# EAGLE board atmega1280_2560_tqfp100 (EAGLE 6.1)
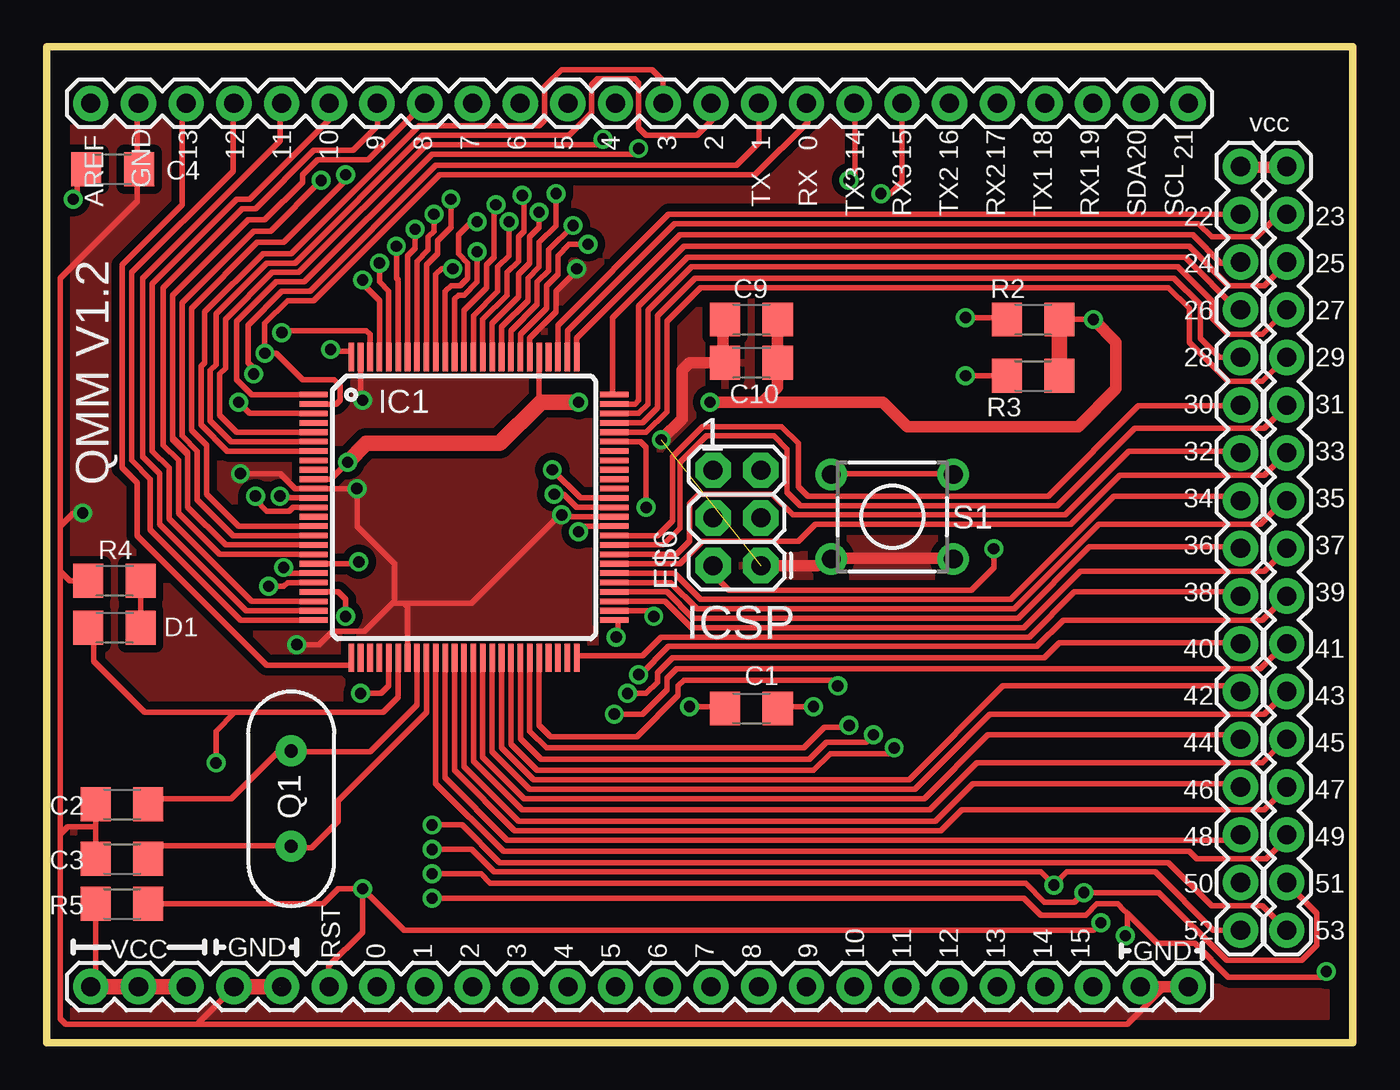
[diagram p0: board, top side]
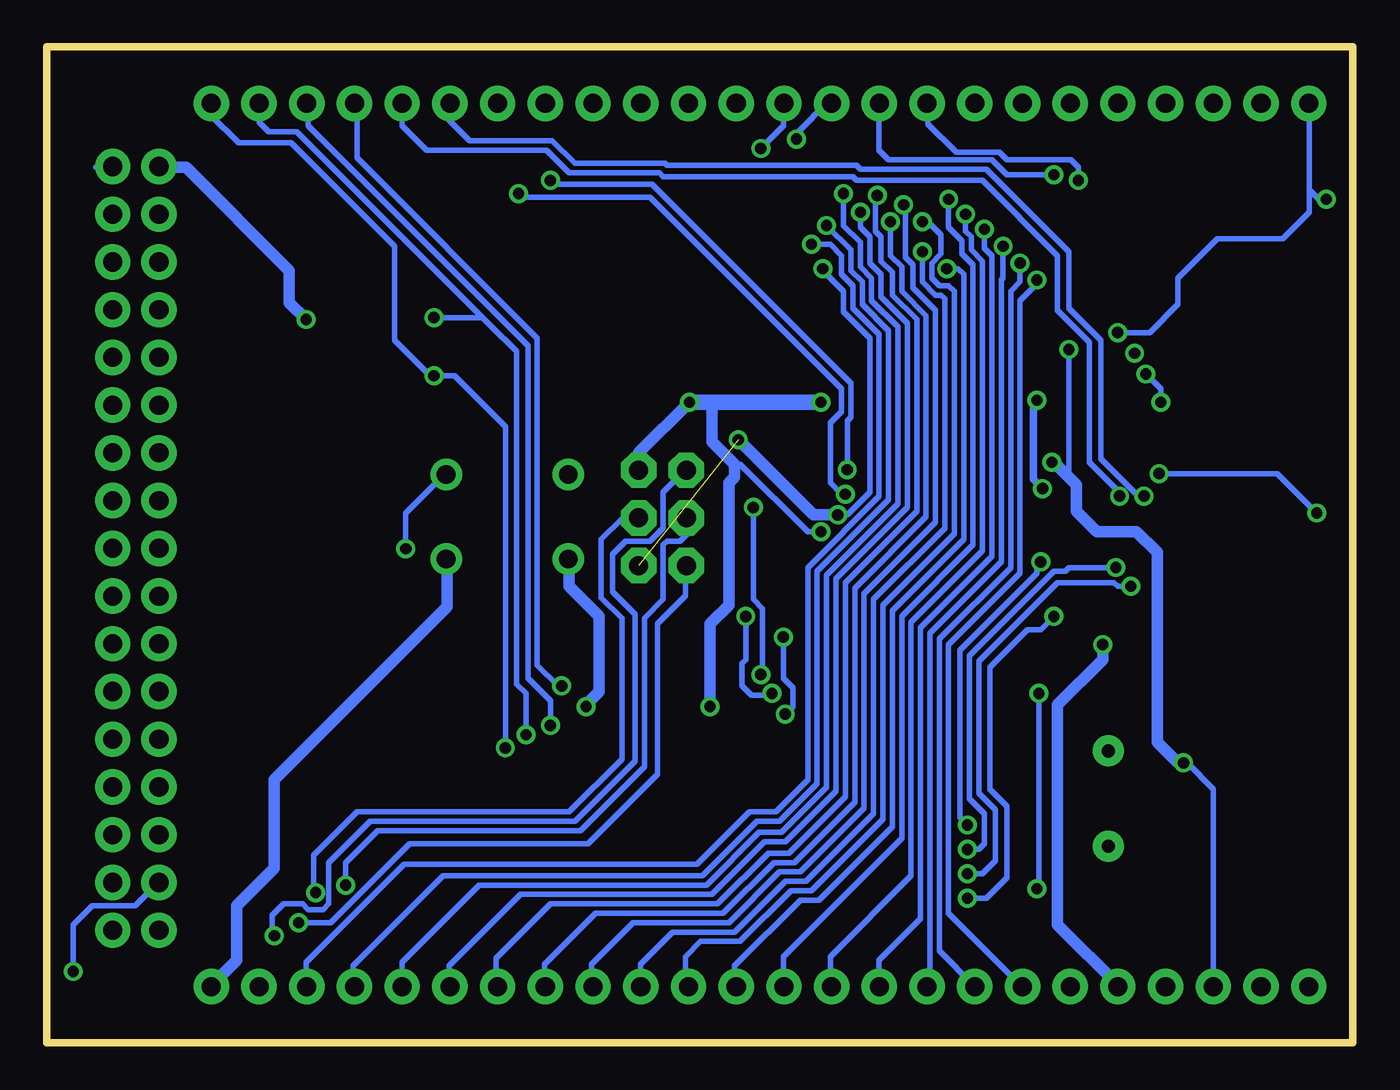
[diagram p1: board, bottom side, seen from below]

Size 69.5 x 53 mm. Coordinates in mm from the lower left corner, seen from the top.
Outline: 69.5,0 69.5,53 0,53 0,0 69.5,0
Copper layers (1*16): Top 0.035mm / dielectric 1.5mm / Bottom 0.035mm
Design rules: minimum track width 10mil, minimum drill 24mil, track to track 16mil, track to pad 16mil, pad to pad 16mil, via to via 16mil, smd to smd 16mil, copper to edge 40mil, drill to drill 8mil, minimum pad ring 10mil, minimum via ring 8mil, stop-mask expansion 4mil, vias tented up to drill 0mil, thermal gap 10mil

## Footprints (pad centres in the part's own frame; a part is rotated, then mirrored left to right if it is on the bottom)
1206 = smd 1.6 x 1.8: 1 -1.4,0; 2 1.4,0
1X17 = drill 1.016 pad 1.88: 1 0,0; 2 2.54,0; 3 5.08,0; 4 7.62,0; 5 10.16,0; 6 12.7,0; 7 15.24,0; 8 17.78,0; 9 20.32,0; 10 22.86,0; 11 25.4,0; 12 27.94,0; 13 30.48,0; 14 33.02,0; 15 35.56,0; 16 38.1,0; 17 40.64,0
1X24 = drill 1.016 pad 1.88: 2 -26.67,0; 3 -24.13,0; 4 -21.59,0; 5 -19.05,0; 6 -16.51,0; 7 -13.97,0; 8 -11.43,0; 9 -8.89,0; 10 -6.35,0; 11 -3.81,0; 12 -1.27,0; 13 1.27,0; 14 3.81,0; 15 6.35,0; 16 8.89,0; 17 11.43,0; 18 13.97,0; 19 16.51,0; 20 19.05,0; 21 21.59,0; 22 24.13,0; 23 26.67,0; 24 29.21,0; 25 31.75,0
2X3 = drill 1.016 pad 1.88 octagon: 1 0,0; 2 0,2.54; 3 2.54,0; 4 2.54,2.54; 5 5.08,0; 6 5.08,2.54
TQFP100 = smd 1.5 x 0.3: 1 -8,6; 2 -8,5.5; 3 -8,5; 4 -8,4.5; 5 -8,4; 6 -8,3.5; 7 -8,3; 8 -8,2.5; 9 -8,2; 10 -8,1.5; 11 -8,1; 12 -8,0.5; 13 -8,0; 14 -8,-0.5; 15 -8,-1; 16 -8,-1.5; 17 -8,-2; 18 -8,-2.5; 19 -8,-3; 20 -8,-3.5; 21 -8,-4; 22 -8,-4.5; 23 -8,-5; 24 -8,-5.5; 25 -8,-6; 51 8,-6; 52 8,-5.5; 53 8,-5; 54 8,-4.5; 55 8,-4; 56 8,-3.5; 57 8,-3; 58 8,-2.5; 59 8,-2; 60 8,-1.5; 61 8,-1; 62 8,-0.5; 63 8,0; 64 8,0.5; 65 8,1; 66 8,1.5; 67 8,2; 68 8,2.5; 69 8,3; 70 8,3.5; 71 8,4; 72 8,4.5; 73 8,5; 74 8,5.5; 75 8,6 | smd 0.3 x 1.5: 26 -6,-8; 27 -5.5,-8; 28 -5,-8; 29 -4.5,-8; 30 -4,-8; 31 -3.5,-8; 32 -3,-8; 33 -2.5,-8; 34 -2,-8; 35 -1.5,-8; 36 -1,-8; 37 -0.5,-8; 38 0,-8; 39 0.5,-8; 40 1,-8; 41 1.5,-8; 42 2,-8; 43 2.5,-8; 44 3,-8; 45 3.5,-8; 46 4,-8; 47 4.5,-8; 48 5,-8; 49 5.5,-8; 50 6,-8; 76 6,8; 77 5.5,8; 78 5,8; 79 4.5,8; 80 4,8; 81 3.5,8; 82 3,8; 83 2.5,8; 84 2,8; 85 1.5,8; 86 1,8; 87 0.5,8; 88 0,8; 89 -0.5,8; 90 -1,8; 91 -1.5,8; 92 -2,8; 93 -2.5,8; 94 -3,8; 95 -3.5,8; 96 -4,8; 97 -4.5,8; 98 -5,8; 99 -5.5,8; 100 -6,8
HC49US = drill 0.7 pad 1.651: 1 -2.54,0; 2 2.54,0
TL1105 = drill 1 pad 1.676: 1 -2.25,3.25; 2 2.25,3.25; 3 -2.25,-3.25; 4 2.25,-3.25

## Placement (x,y rotation side)
C1  0.1uF  [1206]  37.5,17.8 0 top
C2  22pF  [1206]  4,12.7 0 top
C3  22pF  [1206]  4,9.8 0 top
C4  0.1uF  [1206]  3.5,46.5 0 top
C9  0.1uF  [1206]  37.5,38.5 0 top
C10  0.1uF  [1206]  37.5,36.2 0 top
D1  [1206]  3.6,22.1 0 top
E$3  [1X17]  66,6 90 top
E$4  [1X17]  63.54,6 90 top
E$5  [1X24]  29,50 0 top
E$6  [2X3]  38,25.4 90 top
E$27  [1X24]  29,3 0 top
IC1  [TQFP100]  22.2,28.5 0 top
Q1  16MHz  [HC49US]  13,13 90 top
R2  10K  [1206]  52.5,38.5 0 top
R3  10K  [1206]  52.5,35.5 0 top
R4  330  [1206]  3.6,24.6 0 top
R5  10K  [1206]  4,7.4 0 top
S1  [TL1105]  45,28 90 top

## Library data of the parts
C1-C4 C9 C10 D1 E$3-E$6 E$27 IC1 Q1 R2-R5 = SparkFun
S1 = switch

## Nets
GND: C10.1 E$6.1
S$15: E$3.1
S$31: IC1.12
S$36: E$3.16
S$59: R5.1
S$65: R2.2 R3.2
S$68: E$3.6
S$73: E$3.11
S$80: IC1.5
S$86: IC1.3

## Tracks (layer width: path | path; a pad name or v marks a point on that pad's centre or on a via)
GND  (via drill 0.6)  (2 unrouted)
  Top 0.305: 14.1,29.5 13.2,29.5 12.4,30.3 v10.3,30.3 | 2.6,10.2 2.6,11.5 | 2.6,11.5 2.6,12.9 2.5,13 | 2.6,11.5 1.1,11.5 0.7,11.1 | 0.7,11.1 0.7,1.3 1,1 8,1 | 8,1 10,3 | 0.7,11.1 0.7,25.1 | 0.7,25.1 0.7,27.5 | 0.7,27.5 0.7,40.7 4.8,44.8 4.8,50 4.9,50.1 | 8,1 57.5,1 59.5,3 | 2.3,24.6 1.2,24.6 0.7,25.1 | v1.9,28.2 1.4,28.2 0.7,27.5 | 41.7,25.8 41.7,25.7 | 25.7,37.1 25.7,37.5 27.1,38.9 27.1,40 28.2,41.1 v28.2,41.2 | 16.7,36 16.7,34.3 v16.8,34.2 | 14.5,29.5 v16.5,29.5 16.5,27.5 18.5,25.5 18.5,23.5 18.4,23.4 | 29.7,28 27.5,28 v27.4,28.1 27.3,28.1 22.6,23.4 19,23.4 | 19,23.4 18.4,23.4 | 18.4,23.4 16.9,21.9 15.2,21.9 14.5,21.2 v13.3,21.2 | 19.2,20.9 19.2,23.2 19,23.4
  Top 0.61: 58.2,3 59.5,3 60.8,3 | 48.3,25.8 41.7,25.8 | 41.7,25.7 41,25.4 E$6.1 | v32.7,32.1 33.8,33.2 33.8,35.8 34.2,36.2 C10.1
  Top 0.813: 9.9,3 10,3 12.4,3
  Bottom 0.305: v10.3,30.3 4,30.3 v1.9,28.2 | v28.2,41.2 28.2,41.1 27.1,40 27.1,38.9 25.7,37.5 25.7,29.3 26.9,28.1 v27.4,28.1
  Bottom 0.406: v16.8,34.2 16.8,33.9 17,33.7 17,30 v16.5,29.5
  Bottom 0.61: v27.4,28.1 28.7,28.1 v32.7,32.1 | v13.3,21.2 13.3,20.4 15.7,18 15.7,6.3 12.4,3
  pour Top: 0.5,52.5 69,52.5 69,0.5 0.5,0.5
S$1  (via drill 0.6)
  Top 0.305: v21.6,41.2 21,41.2 20.7,40.9 20.7,36.9
  Bottom 0.305: v21.6,41.2 21,41.2 20.7,40.9 20.7,26.8 24.5,23 24.5,11.5 28.4,7.6 29.4,7.6 32.9,4.1 32.9,3.1 32.8,3
S$2  (via drill 0.6)
  Top 0.305: v22.9,43.7 22.6,43.7 21.9,43 21.9,42 22.4,41.5 22.4,40.7 22,40.3 21.5,40.3 21.2,40 21.2,37.1
  Bottom 0.305: v22.9,43.7 22.6,43.7 21.9,43 21.9,42 22.4,41.5 22.4,40.7 22,40.3 21.5,40.3 21.2,40 21.2,27.1 25,23.3 25,11.9 28.8,8.1 29.9,8.1 32.6,5.4 34.7,5.4 35.5,4.6 35.5,3.1 35.4,3
S$3  (via drill 0.6)
  Bottom 0.305: v18.6,42.4 18.6,40.7 18.7,40.6 18.7,25.6 22.5,21.8 22.5,3.2 22.7,3
S$4  (via drill 0.6)
  other vias: 19.6,43.3
S$5  (via drill 0.6)
  Top 0.305: 22.2,37 22.2,39 23.4,40.2 23.4,41.4 23.8,41.8 23.8,44.5 v23.9,44.6
S$6
  Top 0.305: 22.7,37 22.7,38.7 24,40 24,41.3 24.6,41.9 24.6,43.6
S$7
  Bottom 0.305: 19.6,43.2 19.6,42.3 19.2,41.9 19.2,25.9 23,22.1 23,6.6 24.7,4.9
S$8  (via drill 0.6)
  Top 0.305: v22.9,42.1 22.9,40.5 22.2,39.8 21.9,39.8 21.7,39.6 21.7,37
  Bottom 0.305: v22.9,42.1 22.9,40.5 22.2,39.8 21.9,39.8 21.7,39.6 21.7,27.4 25.5,23.6 25.5,12.2 29.1,8.6 30.2,8.6 32.9,5.9 36.2,5.9 37.9,4.2 37.9,3.1 37.8,3
S$9
  Bottom 0.305: 24,44.7 23.8,44.5 23.8,41.8 23.4,41.4 23.4,40.2 22.2,39 22.2,27.7 26,23.9 26,12.5 29.4,9.1 30.5,9.1 33.2,6.4 38.3,6.4 40.5,4.2 40.5,3.1 40.4,3
S$10
  Bottom 0.305: 24.6,43.6 24.6,41.9 24,41.3 24,40 22.7,38.7 22.7,28 26.5,24.2 26.5,12.8 29.7,9.6 30.8,9.6 33.5,6.9 40.3,6.9 43,4.2 43,3.1 42.9,3
S$11  (via drill 0.6)
  other vias: 24.6,43.7
S$12
  Bottom 0.305: 25.2,45.1 25.3,45.1 25.4,45 25.4,43.2 25.1,42.9 25.1,41.6 24.5,41 24.5,39.8 23.2,38.5 23.2,28.3 27,24.5 27,13.1 30,10.1 31.1,10.1 33.8,7.4 42.7,7.4 45.6,4.5 45.6,3.1 45.5,3
S$13
  Top 0.305: 19.7,20.1 19.7,18 17.2,15.5 12.3,15.5 9.8,13 5.7,13
S$14
  Top 0.305: 20.2,20.1 20.2,17.6 15.5,12.9 15.5,11.8 14.1,10.4 13.1,10.4 13,10.5 5.8,10.5
S$15  (via drill 0.6)
  Top 0.305: 14.6,25.5 15.6,25.5 16.2,25.5 16.5,25.5 v16.6,25.6 | E$3.1 64.7,7.3 62,7.3 59.7,9.6 24.1,9.6 22.1,11.6 v20.5,11.6
  Bottom 0.305: v20.5,11.6 20.9,12 20.9,20.9 16.8,25 16.8,25.4 v16.6,25.6
S$16
  Top 0.305: 41.7,30.3 48.3,30.3
S$17
  Bottom 0.305: 23.9,5.7 25.2,4.4 25.2,3
S$18  (via drill 0.6)
  Top 0.305: v16.8,40.6 16.8,40.4 17.7,39.5 17.7,37
  Bottom 0.305: v16.8,40.6 16.8,40.4 17.7,39.5 17.7,25 21.5,21.2 21.5,6.9 17.6,3
S$19  (via drill 0.6)
  Top 0.305: v17.7,41.5 17.7,40.5 18.2,40 18.2,37.1
  Bottom 0.305: v17.7,41.5 17.7,40.5 18.2,40 18.2,25.3 22,21.5 22,4.9 20.1,3
S$20
  Top 0.305: 18.6,42.3 18.6,40.7 18.7,40.6 18.7,39.3 18.7,38.9 18.7,37.1
S$21
  Top 0.305: 19.6,43.2 19.6,42.3 19.2,41.9 19.2,39.1 19.2,38.8 19.2,37.1
S$22  (via drill 0.6)
  Top 0.305: 19.7,37.2 19.7,41.6 20.3,42.2 20.3,42.9 20.6,43.2 v20.6,44.1
  Bottom 0.305: v20.6,44.1 20.6,43.2 20.3,42.9 20.3,42.2 19.7,41.6 19.7,26.2 23.5,22.4 23.5,8.9 27.8,4.6 27.8,3.2 27.6,3
S$23  (via drill 0.6)
  Top 0.305: 20.2,37 20.2,41.4 20.8,42 20.8,42.7 21.5,43.4 v21.5,44.9
  Bottom 0.305: v21.5,44.9 21.5,43.4 20.8,42.7 20.8,42 20.2,41.4 20.2,26.5 24,22.7 24,10.9 30.3,4.6 30.3,2.9
S$24  (via drill 0.6)
  Top 0.305: 23.2,37 23.2,38.5 24.5,39.8 24.5,41 25.1,41.6 25.1,42.9 25.4,43.2 25.4,45 v25.3,45.1
S$25  (via drill 0.6)
  Top 0.305: 23.7,37.1 23.7,38.3 25.1,39.7 25.1,40.9 25.7,41.5 25.7,42.9 26.2,43.4 v26.2,44.2
  Bottom 0.305: v26.2,44.2 26.2,43.4 25.7,42.9 25.7,41.5 25.1,40.9 25.1,39.7 23.7,38.3 23.7,28.5 27.5,24.7 27.5,13.4 30.2,10.7 31.3,10.7 34.1,7.9 44.3,7.9 48.1,4.1 48.1,3.1 48,3
S$26  (via drill 0.6)
  Top 0.305: 24.2,37 24.2,38.1 25.6,39.5 25.6,40.7 26.2,41.3 26.2,42.6 27.1,43.5 v27.1,45.2
  Bottom 0.305: v27.1,45.2 27.1,43.5 26.2,42.6 26.2,41.3 25.6,40.7 25.6,39.5 24.2,38.1 24.2,28.7 28,24.9 28,13.6 30.4,11.2 31.6,11.2 34.4,8.4 46.5,8.4 50.6,4.3 50.6,3
S$27  (via drill 0.6)
  Top 0.305: 24.7,37 24.7,37.9 26.1,39.3 26.1,40.5 26.7,41.1 26.7,42.2 v28,43.5
  Bottom 0.305: v28,43.5 26.7,42.2 26.7,41.1 26.1,40.5 26.1,39.3 24.7,37.9 24.7,28.9 28.5,25.1 28.5,13.8 30.5,11.8 31.7,11.8 34.6,8.9 48.4,8.9 53.2,4.1 53.2,3.1 53.1,3
S$28  (via drill 0.6)
  Top 0.305: 25.2,36.9 25.2,37.7 26.6,39.1 26.6,40.3 27.2,40.9 27.2,41.9 27.8,42.5 v28.8,42.5
  Bottom 0.305: v28.8,42.5 27.8,42.5 27.2,41.9 27.2,40.9 26.6,40.3 26.6,39.1 25.2,37.7 25.2,29.1 29,25.3 29,14 30.7,12.3 32.1,12.3 34.9,9.5 50.5,9.5 55.7,4.3 55.7,3
S$30  (via drill 0.6)
  Top 0.305: 16.2,36.8 15.2,36.8 v15.1,36.9 | 14.6,30 15.1,30 v16,30.9 | 26.2,36 26.2,34 | 18.7,20.1 18.7,18.4 17.9,17.6 10,17.6 | v9,14.9 9,16.6 10,17.6 | 2.5,22.3 2.5,20.3 5.2,17.6 10,17.6 | v55.7,38.5 54.3,38.5
  Top 0.61: 38.9,38.4 38.9,34.9 38.1,34.1 37.4,34.1 | v35.3,34.1 37.4,34.1 | 37.4,34.1 44.5,34.1 45.8,32.8 54.9,32.8 56.9,34.8 56.9,37.3 v55.7,38.5
  Top 0.813: v16,30.9 17,31.9 24.1,31.9 26.2,34 26.3,34.1 v28.3,34.1
  Bottom 0.305: v16,30.9 15.9,30.9 | v15.1,36.9 15.1,30.1 15,30 | 7.4,3 7.4,13.5 8.8,14.9 v9,14.9 9.3,14.9
  Bottom 0.61: 38,30.5 38,31.4 v35.3,34.1 | 15.9,30.9 15,30 14.7,29.7 14.7,28.3 13.6,27.2 11.5,27.2 10.4,26.1 10.4,16 9.3,14.9 | 63.6,46.6 62.1,46.6 56.6,41.1 56.6,39.4 v55.7,38.5
  Bottom 0.813: v28.3,34.1 v35.3,34.1
S$31  (via drill 0.6)
  Top 0.305: IC1.12 12.5,29 v12.4,29.1
S$32
  Bottom 0.61: 48.2,25.8 48.2,23.2 57.4,14 57.4,9.3 59.4,7.3 59.4,4.4 60.8,3
S$33
  Top 0.61: 36,36.3 36,38.4
S$34
  Top 0.61: 63.5,46.6 66,46.6
S$35
  Top 0.305: 63.5,44.1 33.1,44.1 27.2,38.2 27.2,37
S$36
  Top 0.305: E$3.16 65.6,44.1 64.4,42.9 62,42.9 61.3,43.6 33.4,43.6 27.7,37.9 27.7,37.1
S$37
  Top 0.305: 63.6,41.5 62.5,41.5 61,43 33.7,43 28.2,37.5 28.2,36.9
S$38
  Top 0.305: 5,24.3 5,22.2
S$39
  Top 0.305: 30.1,34.5 30.1,38.6 33.9,42.4 60.8,42.4 62.9,40.3 64.8,40.3 66,41.5
S$40
  Top 0.305: 30.5,34 31.3,34 31.5,34.2 31.5,39.2 34.1,41.8 60.6,41.8 63.4,39 63.5,39
S$41
  Top 0.305: 30.6,33.5 31.5,33.5 32,34 32,39 34.3,41.3 60.2,41.3 62,39.5 62,38.6 62.9,37.7 64.7,37.7 66,39
S$42
  Top 0.305: 30.4,33 31.7,33 32.5,33.8 32.5,38.7 34.5,40.7 60,40.7 61.4,39.3 61.4,37.5 62.4,36.5 63.5,36.5
S$43
  Top 0.305: 30.6,32.5 31.9,32.5 33,33.6 33,38.4 34.8,40.2 59.7,40.2 60.8,39.1 60.8,37.3 62.9,35.2 64.7,35.2 66,36.5
S$44
  Top 0.305: 30.5,27 32.5,27 33.3,27.8 33.3,31.2 34.9,32.8 39.1,32.8 40,31.9 40,29.6 40.5,29.1 53.3,29.1 58.1,33.9 63.6,33.9
S$45
  Top 0.305: 30.5,26.5 32.8,26.5 33.7,27.4 33.7,30.9 35.1,32.3 38.7,32.3 39.4,31.6 39.4,29.3 40.1,28.6 53.8,28.6 57.9,32.7 64.8,32.7 66,33.9
S$46  (via drill 0.6)
  Top 0.305: 35.4,25.4 35.4,25 36.3,24.1 49.2,24.1 50.4,25.3 v50.4,26.3
  Bottom 0.305: v50.4,26.3 50.4,28.2 48.3,30.3
S$47  (via drill 0.6)
  Top 0.305: v20.5,9 23.1,9 23.6,8.5 52.1,8.5 53.1,7.5 54.7,7.5 v55.2,8 59.2,8 62.8,4.4 66.8,4.4 67.6,5.2 67.6,6.9 66,8.5 | 13.8,24.5 12.8,24.5 12.6,24.3 v11.8,24.3
  Bottom 0.305: 38,27.9 38.9,27.9 40,26.8 40,23.7 38.9,22.6 38.9,15.1 41.7,12.3 53,12.3 55.3,10 55.3,8.1 v55.2,8 | v20.5,9 19.7,9 19,9.7 19,12.4 19.9,13.3 19.9,20.3 15.7,24.5 12.7,24.5 12.5,24.3 v11.8,24.3
S$48
  Top 0.305: 30.5,25 33.4,25 34.8,23.6 51.3,23.6 56.8,29.1 63.4,29.1 63.6,28.9
S$49
  Top 0.305: 30.7,24.5 33.2,24.5 34.6,23.1 51.5,23.1 56,27.6 64.6,27.6 65.9,28.9
S$50
  Top 0.305: 30.5,24 33,24 34.4,22.6 51.7,22.6 55.5,26.4 63.5,26.4 63.6,26.3
S$51
  Top 0.305: 30.5,23.5 32.9,23.5 34.3,22.1 52,22.1 55,25.1 64.8,25.1 66,26.3
S$52
  Top 0.305: 28.2,20.6 31.7,20.6 32.7,21.6 52.3,21.6 54.7,24 63.4,24 63.6,23.8
S$53  (via drill 0.6)
  Top 0.305: 13.9,25 12.9,25 v12.6,25.3 | v20.5,10.3 22.6,10.3 23.8,9.1 52.9,9.1 v53.6,8.4 54.3,9.1 59,9.1 62.1,6 63.5,6
  Bottom 0.305: v12.6,25.3 15.1,25.3 15.3,25.1 15.9,25.1 20.4,20.6 20.4,13 19.6,12.2 19.6,10.6 19.9,10.3 v20.5,10.3 | v53.6,8.4 53.6,9.6 51.9,11.3 41.1,11.3 37.7,14.7 37.7,22.6 36.7,23.6 36.7,26.5 36.5,26.7 35.8,26.7 35.4,27.1 35.4,27.9
S$54  (via drill 0.6)
  Top 0.305: 30.7,23 32,23 v32.3,22.7 | v30.9,18.6 31.9,18.6 32.5,19.2 32.5,19.7 33.3,20.5 53.1,20.5 53.9,21.3 63.4,21.3 63.5,21.2
  Bottom 0.305: v32.3,22.7 32.3,20.4 32.5,20.2 32.5,19 32,18.5 31,18.5 v30.9,18.6
S$55
  Top 0.305: 63.5,13.6 63.3,13.8 49.3,13.8 47.3,11.8 25.1,11.8 23.9,13 22.2,14.7 22.2,20.1
S$56  (via drill 0.6)
  Top 0.305: 30.3,32 31.6,32 31.9,31.7 v31.9,28.5 | v31.5,19.6 31.6,19.6 33.1,21.1 52.7,21.1 54.1,22.5 64.7,22.5 66,23.8
  Bottom 0.305: v31.9,28.5 31.9,23.6 31.4,23.1 31.4,19.7 v31.5,19.6
S$57  (via drill 0.6)
  Top 0.305: 30.4,22.5 30.4,21.7 v30.3,21.6 | v30.2,17.5 31.7,17.5 33,18.8 33,19.4 33.5,19.9 64.6,19.9 66,21.3
  Bottom 0.305: v30.3,21.6 30.3,19.4 29.8,18.9 29.8,17.9 v30.2,17.5
S$58  (via drill 0.6)
  Top 0.305: 26.2,20.4 26.2,16.9 26.8,16.3 31.4,16.3 33.6,18.5 33.6,19 33.9,19.3 41.8,19.3 v42.1,19
  Bottom 0.305: v42.1,19 42.3,19 43.4,20.1 43.4,37.5 53,47.1 53,49.9 53.1,50
S$59
  Top 0.305: R5.1 2.6,3.3 2.3,3
  Top 0.813: 2.3,3 7.4,3
S$60  (via drill 0.6)
  Top 0.305: v40.8,17.9 39.1,17.9 39,17.8
  Bottom 0.305: v40.8,17.9 40.8,18
  Bottom 0.61: 40.8,18 40.1,18.7 40.1,22.7 41.7,24.3 41.7,25.8
S$61
  Top 0.305: 66,13.6 64.8,12.4 48.7,12.4 47.6,11.3 24.9,11.3 21.7,14.5 21.7,20.1
S$62
  Top 0.305: 21.2,20.1 21.2,14.1 24.5,10.8 63.2,10.8 63.5,11.1
S$63
  Top 0.305: 66,11.1 66,10.9 64.9,9.8 61.2,9.8 60.8,10.2 24.3,10.2 20.7,13.8 20.7,20
S$64  (via drill 0.6)
  Top 0.305: 25.7,20.1 25.7,16.6 26.6,15.7 40.3,15.7 41.4,16.8 42.6,16.8 v42.7,16.9
  Bottom 0.305: v42.7,16.9 42.7,18.2 43.9,19.4 43.9,37.1 45.3,38.5 55.6,48.8 55.6,49.9 55.7,50
S$65
  Top 0.813: R2.2 R3.2
S$66  (via drill 0.6)
  Top 0.305: 1.6,46.4 1.6,45.1 v1.4,44.9 | 17.2,37 17.2,37.7 17,37.9 12.6,37.9 v12.5,37.8
  Bottom 0.305: 2.3,50 2.3,45.4 | 2.3,45.4 2.3,44.2 3.7,42.8 7.2,42.8 9.3,40.7 9.3,39.3 10.8,37.8 v12.5,37.8 | v1.4,44.9 1.8,44.9 2.3,45.4
S$67
  Top 0.305: 24.2,20.2 24.2,15.7 25.9,14 45.9,14 50.9,19 63.3,19 63.6,18.7
S$68
  Top 0.305: 23.7,20 23.7,15.5 25.7,13.5 46.2,13.5 50.2,17.5 64.8,17.5 E$3.6
S$69
  Top 0.305: 23.2,20.2 23.2,15.2 25.4,13 46.7,13 50.1,16.4 63.2,16.4 63.5,16.1
S$70
  Top 0.305: 22.7,20.1 22.7,15 25.3,12.4 47,12.4 49.5,14.9 64.7,14.9 66,16.2
S$72
  Top 0.305: 30.7,26 33.5,26 34.2,26.7 34.2,28.7 34.7,29.2 38.6,29.2 39.7,28.1 54.2,28.1 57.6,31.5 63.5,31.5 63.6,31.4
S$73
  Top 0.305: 30.4,25.5 33.7,25.5 34.9,26.7 40,26.7 40.9,27.6 54.5,27.6 57.1,30.2 64.8,30.2 E$3.11
S$74  (via drill 0.6)
  Top 0.305: 29.7,28.5 28.2,28.5 27.5,29.2 v27,29.2 | 45.5,50 45.5,45.8 44.9,45.2 v44.4,45.2
  Bottom 0.305: v27,29.2 27.2,29.2 27.8,29.8 27.8,33 27.2,33.6 27.2,34.8 37.4,45 44.2,45 v44.4,45.2
S$75  (via drill 0.6)
  Top 0.305: 14.3,24 15.5,24 15.9,23.6 v15.9,22.7
  Bottom 0.305: 20.6,7.7 19.5,7.7 18.4,8.8 18.4,12.6 19.3,13.5 19.3,20 17.3,22 16.6,22 v15.9,22.7
S$76
  Bottom 0.305: 66.9,46.6 66,46.6
S$79  (via drill 0.6)
  Top 0.305: 13.8,28.5 13.1,28.5 12.9,28.3 11.7,28.3 11.1,28.9 v11.1,29.1
  Bottom 0.305: v11.1,29.1 11.4,29.1 13.4,31.1 13.4,37.4 15.1,39.1 15.1,42.1 19.5,46.5 26.2,46.5 26.4,46.7 36.5,46.7 36.6,46.8 41.4,46.8 42.6,48 47,48 48.1,49.1 48.1,50
S$80  (via drill 0.6)
  Top 0.305: IC1.5 10.1,32.5 9.2,33.4 9.2,35.6 9.5,35.9 9.5,38.5 12,41 13.4,41 20.2,47.8 29.3,47.8 v29.6,48.1 29.5,48
S$81
  Bottom 0.305: 50.6,50 50.6,48.8 49.3,47.5 42.9,47.5 41.7,46.3 36.9,46.3 36.7,46.1 26.6,46.1 26.4,45.9 19.7,45.9 15.7,41.9 15.7,39 14,37.3 14,30.9 12.3,29.2 12.3,29.1
S$83  (via drill 0.6)
  Top 0.305: 29.7,29 28.4,29 v26.9,30.5 | 43,50 43,46.2 v42.7,45.9
  Bottom 0.305: v26.9,30.5 26.9,33.1 26.7,33.3 26.7,35.1 37.3,45.7 42.5,45.7 v42.7,45.9
S$85  (via drill 0.6)
  Top 0.305: 29.8,27.5 28.6,27.5 v28.3,27.2 | v34.2,17.9 36,17.9
  Bottom 0.305: 32.9,30.8 32.6,30.8 29,27.2 v28.3,27.2
  Bottom 0.61: 34.1,34 34.1,32 32.9,30.8 32.9,30.1 33.2,29.8 33.2,23.3 34.2,22.3 v34.2,17.9
S$86  (via drill 0.6)
  Top 0.305: IC1.3 10.8,33.5 v10.2,34.1 | v11,35.6 11,35.9 10.7,36.2 10.7,38.2 12.5,40 14,40 20.7,46.7 36.7,46.7 37.9,47.9 37.9,50
  Bottom 0.305: v10.2,34.1 10.2,34.8 v11,35.6
S$87  (via drill 0.6)
  Top 0.305: 18.2,20.2 18.2,19 17.8,18.6 v16.7,18.6 | 15,3 15,4.1 16.8,5.9 v16.8,8.2 | v56.1,6.4 55.7,6 19,6 v16.8,8.2 | v16.8,8.2 15.5,8.2 14.7,7.4 5.6,7.4
  Bottom 0.305: 35.5,25.4 35.5,23.8 37,22.3 37,14.3 40.7,10.6 50.2,10.6 54.4,6.4 v56.1,6.4 | v16.7,18.6 16.7,8.3 v16.8,8.2
S$88  (via drill 0.6)
  Top 0.305: 14.8,34 15.4,34 15.6,34.2 15.6,35 15.3,35.3 13.6,35.3 12.2,36.7 v11.6,36.7 11.6,38.3 12.8,39.5 14.2,39.5 20.9,46.2 37.7,46.2 40.5,49 40.5,49.9 40.4,50
S$89  (via drill 0.6)
  Top 0.305: 13.8,34.5 10.9,34.5 10.1,35.3 10.1,38.4 12.2,40.5 13.7,40.5 20.5,47.3 31.2,47.3 v31.5,47.6
  Bottom 0.305: 30.3,50 30.3,48.8 v31.5,47.6
S$90
  Bottom 0.305: 29.5,48.1 29.5,48.5 28,50 27.7,50
S$91
  Top 0.305: 32.8,50 32.8,51.2 32.2,51.8 27.4,51.8 26.5,50.9 26.5,49.1 26.2,48.8 19.8,48.8 13,42 11.5,42 8.4,38.9 8.4,36.2 8.2,36 8.2,32.9 9.6,31.5 13.6,31.5
S$93
  Top 0.305: 13.8,32 9.8,32 8.7,33.1 8.7,35.8 9,36.1 9,38.8 11.7,41.5 13.2,41.5 20,48.3 27.8,48.3 29,49.5 29,51 29.3,51.3 31.3,51.3 31.5,51.1 31.5,48.7 31.9,48.3 34.6,48.3 35.4,49.1 35.4,50
S$94  (via drill 0.6)
  Top 0.305: 24.7,20.1 24.7,15.9 26.1,14.5 40.8,14.5 41.7,15.4 44.8,15.4 v45.1,15.7 | v48.9,35.5 51.2,35.5
  Bottom 0.305: v45.1,15.7 45.1,32.8 47.8,35.5 v48.9,35.5 49.1,35.5 51,37.4 51,42.4 56.5,47.9 59.3,47.9 60.8,49.4 60.8,49.9 60.7,50
S$95  (via drill 0.6)
  Top 0.305: 13.9,27.5 10.2,27.5 8.5,29.2 8.5,31.8 7.7,32.6 7.7,39.1 11.2,42.6 12.6,42.6 15.9,45.9 v15.9,46.2
  Bottom 0.305: v15.9,46.2 18.4,46.2 19.2,47 24.7,47 25.2,47.5 25.2,50
S$96  (via drill 0.6)
  Top 0.305: 13.8,27 9.9,27 8,28.9 8,31.5 7.2,32.3 7.2,39.4 11,43.2 11.9,43.2 v14.6,45.9
  Bottom 0.305: v14.6,45.9 14.6,46.6 15,47 18.4,47 18.8,47.4 21.1,47.4 22.6,48.9 22.6,49.9 22.7,50
S$97
  Top 0.305: 13.9,26.5 9.5,26.5 7.5,28.5 7.5,31.3 | 7.5,31.3 7.5,31.4 6.7,32.2 | 6.7,32.2 6.7,32.1 7.5,31.3 | 6.7,32.2 6.7,39.8 10.7,43.8 11.6,43.8 13.6,45.8 13.6,46.2 14.4,47 17.1,47 20.1,50
S$98
  Top 0.305: 14,26 9.2,26 7,28.2 7,31 6.2,31.8 6.2,40.2 10.4,44.4 11.1,44.4 14.2,47.5 16.3,47.5 17.6,48.8 17.6,50
S$99
  Top 0.305: 14.1,23.5 10.9,23.5 6.5,27.9 6.5,30.6 5.6,31.5 5.6,40.4 10.1,44.9 10.8,44.9 15,49.1 15,50
S$100
  Top 0.305: 13.9,23 10.6,23 6,27.6 6,30.3 5.1,31.2 5.1,40.7 12.4,48 12.4,49.9 12.5,50
S$101
  Top 0.305: 13.9,22.5 10.3,22.5 5.5,27.3 5.5,30 4.5,31 4.5,41 9.9,46.4 9.9,50
S$102
  Top 0.305: 16.2,20.1 11.7,20.1 4.8,27 4.8,29.8 4,30.6 4,41.4 7.2,44.6 7.2,49.8 7.4,50
S$104  (via drill 0.6)
  Top 0.305: 25.2,20.2 25.2,16.2 26.3,15.1 40.6,15.1 41.5,16 43.6,16 v44,16.4 | v48.9,38.6 50.9,38.6
  Bottom 0.305: v44,16.4 44,18.6 44.5,19.1 44.5,36.8 45.9,38.2 46.3,38.6 | 46.3,38.6 56.2,48.5 57.7,48.5 58.2,49 58.2,50 | v48.9,38.6 46.3,38.6
S$109  (via drill 0.6)
  Bottom 0.305: v57.4,5.7 57.5,5.8 57.5,6.8 56.9,7.4 55.9,7.4 55.6,7.1 54.8,7.1 54.5,7.4 54.5,9.6 52.3,11.8 41.4,11.8 38.2,15 38.2,22.8 39.4,24 39.4,26 38.7,26.7 37.4,26.7 36.7,27.4 36.7,29.3 35.5,30.5
S$110  (via drill 0.6)
  Top 0.305: 57.4,5.6 57.4,5.7 57.5,5.8 57.5,6.9 | v20.5,7.7 52,7.7 52.9,6.8 55.3,6.8 55.9,7.4 57,7.4 57.3,7.1 57.5,6.9 | 57.5,6.9 59.1,5.3 61.1,5.3 62.9,3.5 67.8,3.5 v68.1,3.8
  Bottom 0.305: 63.6,8.5 64.8,7.3 67.1,7.3 68.1,6.3 v68.1,3.8

## Text on the board
tNames: 9 | 8 | 7 | 6 | 5 | 4 | 3 | 2 | 1 | 0 | vcc | 13 | 12 | 11 | 10 | 14 | 15 | 16 | 17 | 18 | 19 | 20 | 21 | GND | AREF | TX | RX | TX3 | RX3 | TX2 | RX2 | TX1 | RX1 | SDA | 22 | SCL | 23 | 24 | 25 | 26 | 27 | 28 | 29 | 30 | 31 | 1 | 32 | 33 | QMM V1.2 | 34 | 35 | 36 | 37 | 38 | 39 | ICSP | 40 | 41 | 42 | 43 | 44 | 45 | 46 | 47 | 48 | 49 | 50 | 51 | 52 | 53 | GND | VCC | RST | 0 | 1 | 2 | 3 | 4 | 5 | 6 | 7 | 8 | 9 | 10 | 11 | 12 | 13 | 14 | 15 | GND